# Altium PCB CT310高端控制盒核心板电路V1.2.PcbDoc (part 2 of 4)
Units mil, origin at the board's own origin, x right, y up, seen from the top; angles counter-clockwise.
Board outline 3735.76 x 4625 mil, 2 copper layers (TOP, BOTTOM), stack 10.4 mil thick; 194 components, 362 nets, 1084 pads, 348 vias.
Unrouted connection lines stored in the file: 16.
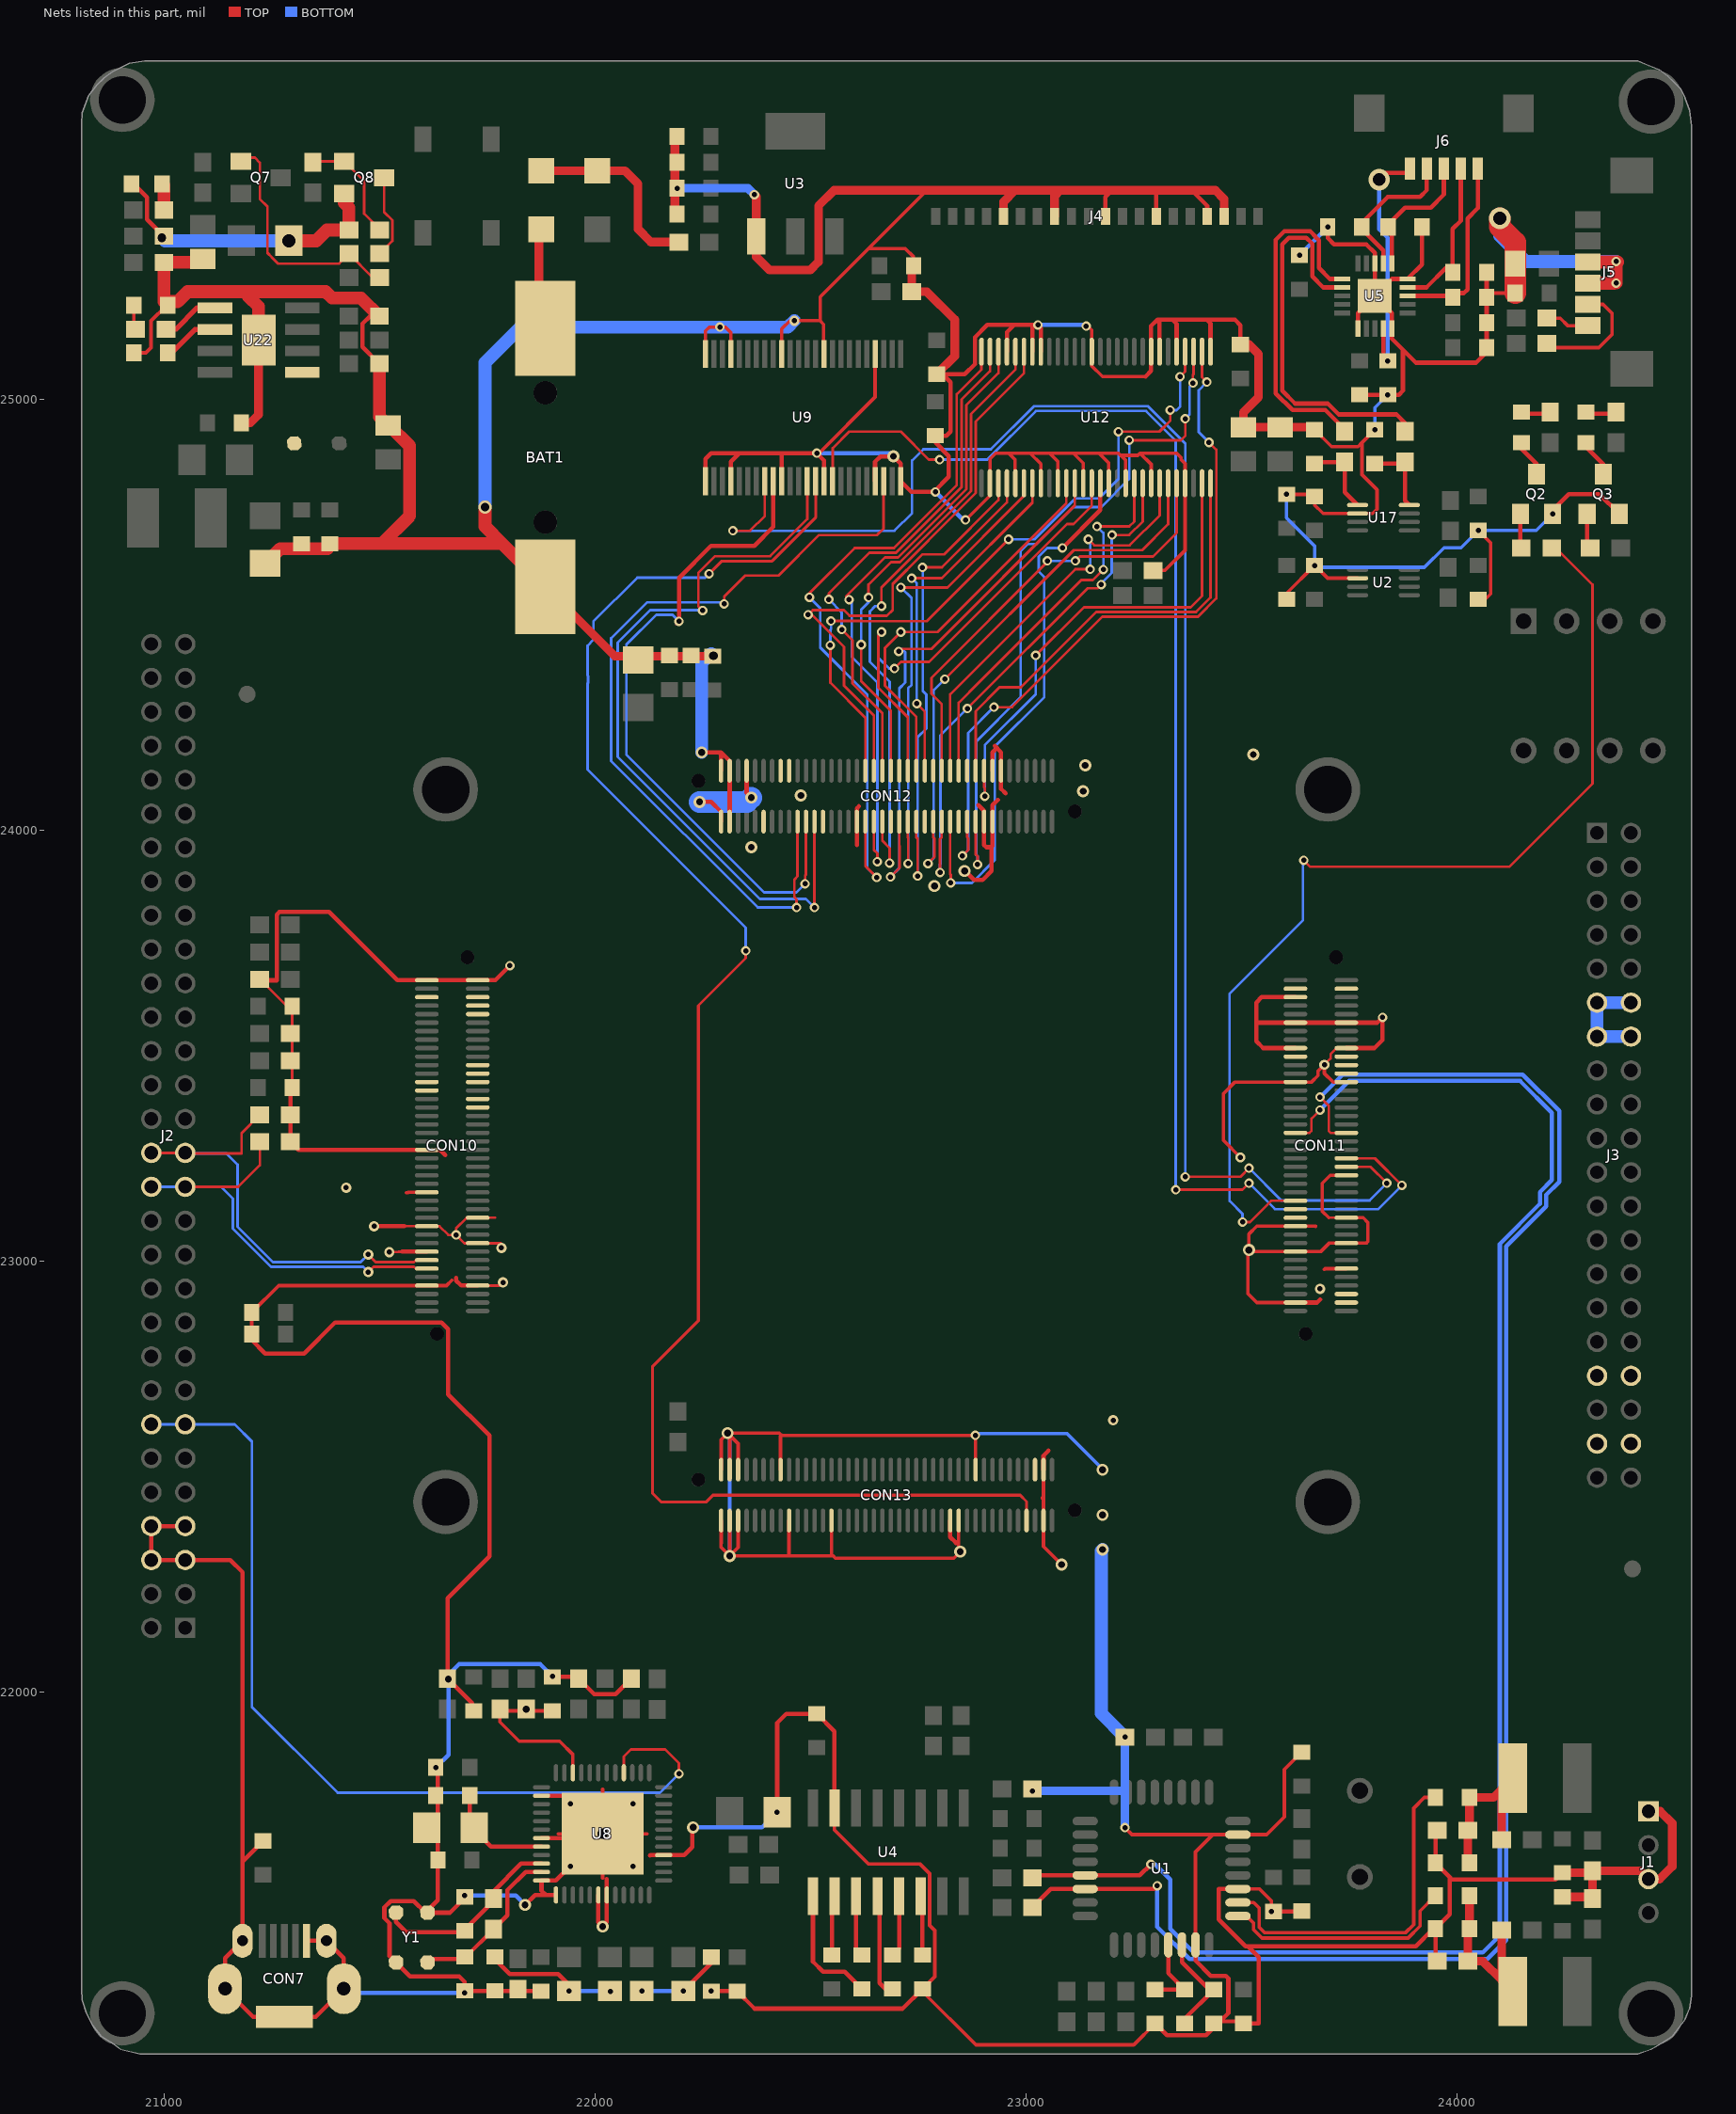
[diagram p2: the nets of this part, all layers, seen from the top]

## Via types
v1: diameter 22, hole 12, TOP to BOTTOM, tented both sides, 194 vias
v2: diameter 22, hole 12, TOP to BOTTOM, 92 vias
v3: diameter 28, hole 16, TOP to BOTTOM, 37 vias
v4: diameter 24, hole 12, TOP to BOTTOM, 17 vias
v5: diameter 50, hole 30, TOP to BOTTOM, tented both sides, 4 vias
v6: diameter 30, hole 20, TOP to BOTTOM, tented both sides, 3 vias
v7: diameter 40, hole 24, TOP to BOTTOM, 1 vias

## Nets (pads, with @x,y where several pads share a name; then routed paths per layer and width w, separated by ;. In a path a pad name is that pad's centre, name@x,y a point inside that pad or via, vN(x,y) a via of type N, cw(c..) or ccw(c..) an arc to the next point about the centre after c; other vN are vias at no path point) (continued)
GM_INT2: CON10.53
GND: BAT1.2 C1.2 C2.2 C3.2 C6.1 C7.1 C8.1 C11.2 C13.2 C16.1 C17.2 C18.2 C20.2 C21.2 C22.2 C23.1 C24.2 C25.2 C26.2 C27.2 C28.1 C29.1 C30.2 C31.2 C32.2 C33.2 C34.2 C35.1 C36.2 C37.2 C38.2 C39.2 C40.2 C41.1 C42.1 C43.1 C44.1 C45.1 C46.1 C47.1 C48.1 C49.1 C50.1 C51.1 C52.1 C53.1 C54.1 C55.1 C56.2 C57.2 C58.2 C59.2 C60.2 C61.2 C62.2 C79.2 C80.2 C87.2 C88.2 C89.1 C93.2 C95.2 C96.2 C112.2 C117.2 C118.2 C128.2 C129.2 C130.2 C148.2 C149.2 C150.2 C154.2 CON7.5 CON7.6 CON7.7 CON7.8 CON7.9 CON7.10 CON10.7 CON10.8 CON10.15 CON10.18 CON10.21 CON10.24 CON10.29 CON10.39 CON10.79 CON10.80 CON11.6 CON11.11 CON11.12 CON11.17 CON11.18 CON11.25 CON11.26 CON11.47 CON11.57 CON11.60 CON11.63 CON11.66 CON11.69 CON11.78 CON12.14 CON12.15 CON12.16 CON12.17 CON12.47 CON12.74 CON12.77 CON12.78 CON12.79 CON12.80 CON13.3 CON13.4 CON13.20 CON13.23 CON13.25 CON13.53 CON13.63 CON13.66 CON13.75 CON13.76 CON13.77 CON13.78 CON13.79 CON13.80 D3.2 J1.1 J1.3 J2.5 J2.6 J2.7 J2.8 J3.11 J3.12 J3.13 J3.14 J3.33 J3.34 J3.37 J3.38 J4.3 J4.4 J4.7 J4.10 J4.13 J4.16 J5.3 J5.4 Q2.2 Q3.2 Q8.2 R4.1 R5.1 R11.2 R12.2 R14.1 R15.1 R26.1 R29.1 R32.2 R33.2 R42.1 R43.2 R44.1 R45.2 R89.2 R119.1 R120.1 R128.1 R129.1 R133.2 R135.2 R174.1 U1.3 U1.7 U1.31 U2.2 U3.1 U4.15 U5.6 U5.10 U5.15 U5.18 U5.21 U8.1 U8.6 U8.7 U8.16 U8.38 U8.43 U8.48 U8.49 U9.4 U9.10 U9.15 U9.21 U9.24 U9.25 U9.28 U9.34 U9.39 U9.45 U9.48 U12.2 U12.5 U12.8 U12.10 U12.13 U12.16 U12.18 U12.21 U12.25 U12.29 U12.33 U12.35 U12.36 U12.43 U12.49 U12.50 U12.53 U17.2 U22.9 Y1.2 Y1.4 | length 41790.9
  TOP w6: R174.1@21224.93,23651.63 21285.35,23591.21 C87.2@21297.22,23591.21 C88.2@21297.22,23402.43 ; v4(21522.85,23020.81) 21542.85,23020.81 21543.88,23021.83 21552.85,23021.83 ; 21557.85,23080.57 21558.17,23080.88 CON10.21@21609.9,23080.88 21639.12,23080.88 21659.43,23060.57 v2(21677.85,23060.57) ; CON10.8@21728.01,22943.1 21785.38,22943.1 21786.85,22944.57 v4(21786.85,22950.57) ; 21764.52,23100.57 21767.85,23100.57 ; 21764.51,23100.58 CON10.24@21728.01,23100.58 21702.58,23100.58 21677.85,23075.85 v2(21677.85,23060.57) ; v4(21782.85,23030.57) 21782.85,23040.57 21781.91,23041.51 CON10.18@21728.01,23041.51 21696.91,23041.51 v2(21677.85,23060.57) ; v4(23692.85,23455.57) 23707.26,23469.98 23707.26,23480.38 23721.16,23494.28 CON11.17@23743.76,23494.28 ; 23702.86,23100.58 CON11.57@23743.76,23100.58
  TOP w8: C96.2@20930.06,25107.85 20957.85,25107.85 20970,25120 20970,25182.06 21005.8,25217.85 C95.2@21008.8,25217.85 C95.2@21017.74,25226.79 ; C112.2@21203.48,22830.57 C117.2@21203.48,22880.57 21266.01,22943.1 CON10.7@21609.9,22943.1 21655.38,22943.1 21667.85,22955.57 ; 21562.85,23158.94 21566.23,23158.94 21566.9,23159.62 CON10.29@21609.9,23159.62 ; 21914.85,21670.57 v7(22017.85,21670.57) ; 22017.85,21567.57 v7(22017.85,21670.57) ; 22017.85,21773.57 v7(22017.85,21670.57) ; 22120.86,21670.57 v7(22017.85,21670.57) ; U9.24@22256.47,25105.28 22256.47,25158.54 22265.57,25167.64 v1(22290,25167.64) 22302.85,25167.64 22315.53,25154.96 U9.21@22315.53,25105.28 ; CON13.79@22292.97,22397.81 22292.97,22345.69 22292.85,22345.57 22292.85,22335.57 v3@22312.66,22315.76 ; CON13.80@22292.97,22515.93 22292.97,22585.69 v3(22307.85,22600.57) ; CON13.77@22312.66,22397.81 v3@22312.66,22315.76 ; CON13.78@22312.66,22515.93 v3@22312.66,22595.76 ; v3(22312.85,22315.57) 22450.45,22315.57 ; CON13.75@22332.34,22397.81 22332.34,22335.44 v3@22312.66,22315.76 ; CON13.76@22332.34,22515.93 22332.34,22576.08 v3@22312.66,22595.76 ; C34.2@22402.85,21692.57 C34.2@22402.85,21748.57 ; CON13.66@22430.77,22515.93 22430.77,22593.49 22432.85,22595.57 ; U9.15@22433.65,25105.28 22433.65,25163.43 v4@22452.85,25182.64 ; CON13.63@22450.45,22397.81 22450.45,22315.57 ; v4(22462.85,25182.64) 22522.36,25182.64 ; v1(22515,24875) 22520,24875 22650.17,25005.17 U9.4@22650.17,25105.28 ; U9.10@22532.06,25105.28 22530.76,25106.59 22530.76,25174.24 22522.36,25182.64 ; 22548.88,22319.54 CON13.53@22548.88,22397.81 ; U4.15@22555.96,21730.67 22555.96,21679.04 22634,21601 22754.02,21601 22776.77,21578.26 22776.77,21458.23 22788.69,21446.31 22788.69,21339.31 C13.2@22760,21310.63 22760,21305 22884,21181 23250.37,21181 C16.1@23300,21230.63 ; C150.2@22739.37,25310 22739.37,25330.63 22720,25350 22635,25350 ; 22770,25485 22635,25350 ; 22837.85,22345.57 22844.15,22351.87 ; CON13.23@22844.15,22397.81 22844.15,22351.87 ; v1(22860,24720) 22916.79,24776.79 U12.2@22916.79,24805.4 22916.79,24861.79 22930,24875 22960,24875 ; CON13.20@22883.52,22515.93 22883.52,22594.91 v1(22882.85,22595.57) 22432.85,22595.57 ; U12.5@22975.85,24805.4 22975,24806.24 22975,24860 22960,24875 ; U12.8@23034.9,24805.4 23034.9,24850.1 23010,24875 ; 23037.85,22450.57 23041,22447.43 ; CON13.4@23041,22515.93 23041,22447.43 ; U12.10@23074.27,24805.4 23074.27,24855.73 23055,24875 ; v3(23082.85,22295.57) 23057.85,22320.57 23057.85,22320.77 23041,22337.63 CON13.3@23041,22397.81 23041,22447.43 ; U12.13@23133.33,24805.4 23133.33,24851.67 23110,24875 ; v1@23141.99,25171.99 23153.01,25160.97 U12.43@23153.01,25110.52 23153.01,25077.49 23177.85,25052.64 23277.85,25052.64 ; U12.16@23192.38,24805.4 23192.38,24852.62 23170,24875 ; v1(23230,21685) 23246.26,21668.74 23433.74,21668.74 ; U12.18@23231.75,24805.4 23231.75,24858.25 23215,24875 ; U12.21@23290.81,24805.4 23290.81,24849.19 23265,24875 ; R89.2@23295.43,24602.85 23322.85,24602.85 23369.55,24649.55 U12.25@23369.55,24805.4 23369.55,24850.96 23360,24860.5 23360,24865 23350,24875 23265,24875 ; U1.31@23393.74,21412.83 23393.74,21628.74 23433.74,21668.74 ; C8.1@23450.63,21235.63 C7.1@23505,21235.63 ; U1.3@23492.17,21542.76 23542.24,21542.76 23570,21515 v1(23570,21490.63) ; v2(23497.85,23240.57) 23458.89,23279.53 23458.89,23388.89 23485.54,23415.54 CON11.26@23625.65,23415.54 23663.12,23415.54 23678,23430.42 23678,23440.72 v4(23692.85,23455.57) 23692.85,23435.61 23712.92,23415.54 CON11.25@23743.76,23415.54 ; C40.2@23605,24535.63 23605,24549.37 v1(23670,24614.37) 23670.63,24614.37 23700.16,24584.84 U2.2@23769.96,24584.84 ; C57.2@23605,24779.37 23665,24779.37 C80.2@23670,24774.37 23670,24755 23690.16,24734.84 U17.2@23769.96,24734.84 23804.84,24734.84 23815,24745 23815,24790 23780,24825 23780,24899.37 ; CON11.78@23625.65,22903.72 23536.28,22903.72 23515,22925 23515,23022.79 v3(23517.85,23025.65) ; C23.1@23640,21860 23600,21820 23600,21710 23558.74,21668.74 U1.7@23492.17,21668.74 23433.74,21668.74 ; C149.2@23670,24929.37 23709.37,24890 23770.63,24890 23780,24899.37 ; 23672.85,23080.57 23672.54,23080.88 CON11.60@23625.65,23080.88 23535.88,23080.88 23517.85,23062.85 v3(23517.85,23025.65) ; 23692.85,22980.57 23694.75,22982.47 CON11.69@23743.76,22982.47 ; 23702.86,23100.58 23687.85,23115.58 23687.85,23180.58 23706.26,23198.99 CON11.47@23743.76,23198.99 ; CON11.57@23743.76,23100.58 23782.85,23100.58 23793.42,23090 23793.42,23044.94 23790,23041.51 CON11.63@23743.76,23041.51 23703.79,23041.51 23684.12,23021.83 CON11.66@23625.65,23021.83 23521.67,23021.83 v3(23517.85,23025.65) ; v1(23810,24929.37) 23780,24899.37 ; C25.2@24050,24535.63 24065.63,24535.63 24078.69,24548.69 24078.69,24666.94 v1(24050,24695.63) ; C55.1@24069.37,25246.67 C49.1@24135.63,25246.67 ; v3(22307.85,22600.57) v3@22312.66,22595.76 ; v3(22307.85,22600.57) 22427.85,22600.57 22432.85,22595.57 ; 22450.45,22315.57 22552.85,22315.57 22557.85,22310.57 22832.85,22310.57 v3(22847.85,22325.57) 22844.15,22329.28 22844.15,22351.87 ; 22522.36,25182.64 22522.64,25182.64 22522.64,25237.64 22635,25350 ; 22960,24875 23010,24875 ; 23010,24875 23055,24875 ; 23055,24875 23110,24875 ; 23110,24875 23170,24875 ; 23170,24875 23215,24875 ; 23215,24875 23220,24870 23260,24870 23265,24875
  TOP w10: D3.2@20932.93,25500 20932.93,25496.69 20960.65,25468.97 20960.65,25417.78 R5.1@20999.22,25379.22 ; J2.7@21049.37,22384.86 J2.8@20970.63,22384.86 J2.6@20970.63,22306.12 J2.5@21049.37,22306.12 21153.88,22306.12 21181.99,22278.01 21181.99,21606.36 ; C112.2@21203.48,22830.57 21203.48,22816.52 21235,22785 21325,22785 21396.88,22856.88 21644.3,22856.88 21659.53,22841.65 21659.53,22690.47 21755,22595 21755,22315 21657.85,22217.85 R44.1@21657.85,22031 21715,21973.86 C33.2@21715,21956.2 ; R174.1@21222.42,23654.14 21224.93,23651.63 21261.63,23651.63 21261.63,23803.83 21267.81,23810 21383.42,23810 21541.67,23651.75 CON10.79@21609.9,23651.75 CON10.80@21728.01,23651.75 21769.03,23651.75 v2(21802.85,23685.57) ; C89.1@21230,21654.37 21181.99,21606.36 ; C88.2@21293.29,23398.49 R129.1@21293.29,23339.5 R128.1@21293.29,23276.57 21311.8,23258.06 CON10.39@21609.9,23258.06 21640.37,23258.06 21652.85,23245.57 ; CON7.5@21330.61,21422.42 CON7.7@21376.87,21422.42 21417.22,21382.07 CON7.9@21417.22,21311.2 ; CON7.9@21417.22,21277.78 CON7.9@21417.22,21311.2 ; v4(21487.85,23080.57) 21488.17,23080.88 21558.17,23080.88 ; R135.2@21499.28,25192.85 21477.85,25192.85 21460.65,25175.65 21460.65,25121.59 21499.38,25082.85 R133.2@21499.86,25082.85 ; 21552.85,23021.83 CON10.15@21609.9,23021.83 ; C27.2@21609.88,21685 21635.63,21659.25 C31.2@21635.63,21610 21635.63,21516.5 21611.54,21492.41 Y1.2@21611.54,21487.68 ; v1(21630.63,21825) 21635.63,21820 C27.2@21635.63,21685 ; 21677.85,22960.57 21677.85,22954.76 21689.51,22943.1 CON10.8@21728.01,22943.1 ; v1(21697.85,21301.2) C36.2@21697.85,21306.2 ; C37.2@21697.85,21521.44 21664.09,21487.68 Y1.2@21611.54,21487.68 ; C37.2@21697.85,21524.37 v1(21697.85,21527.15) ; R33.2@21821.43,21306.2 21874.43,21306.2 C38.2@21875,21305.63 ; R33.2@21821.43,21310.14 21817.49,21306.2 C29.1@21767.85,21306.2 C36.2@21697.85,21306.2 ; v3(21837.85,21505.57) 21861.12,21528.84 21886.12,21528.84 ; U8.43@21876.12,21660.73 22008.01,21660.73 v2(21942.85,21595.57) 21909.59,21562.3 U8.48@21876.12,21562.3 21876.12,21538.84 21886.12,21528.84 ; U8.38@21876.12,21759.15 21929.27,21759.15 v7(22017.85,21670.57) ; v1(21901.43,22036.43) C35.1@21901.43,22034.94 21958.38,22034.94 R45.2@21962.32,22031 21998.32,21995 22048.1,21995 R42.1@22084.11,22031 ; U8.1@21909.59,21528.84 21886.12,21528.84 ; U8.6@22008.01,21528.84 22008.01,21465.41 v3(22017.85,21455.57) 22027.7,21465.41 U8.7@22027.7,21528.84 22027.7,21565.41 ; 22127.85,21620.57 22128.64,21621.36 U8.16@22159.59,21621.36 22207.72,21621.36 22226.36,21640 22226.36,21685.57 v3(22227.85,21685.57) ; C41.1@22190.63,25430 v1(22190.63,25490) C42.1@22190.63,25550 C43.1@22190.63,25610 ; v3(22242.85,24065.57) 22269.76,24065.57 22292.97,24042.36 CON12.79@22292.97,24019.86 ; v3(22247.85,24180.57) 22287.85,24180.57 ; U9.25@22256.47,24810 22256.47,24861.47 22270,24875 22335,24875 ; v1(22270,21305.63) C39.2@22330,21305.63 22370.63,21265 22714.37,21265 C13.2@22760,21310.63 ; CON12.80@22292.97,24137.98 22292.97,24175.45 22287.85,24180.57 ; CON12.77@22312.66,24019.86 CON12.78@22312.66,24137.98 22312.66,24160.48 22292.57,24180.57 22287.85,24180.57 ; U9.28@22315.53,24810 22315.53,24855.53 22335,24875 ; CON12.74@22352.03,24137.98 22352.03,24086.39 v3(22362.85,24075.57) ; v1(22422.97,21720.57) 22422.97,21927.97 22444.37,21949.37 C11.2@22515,21949.37 22555.96,21908.41 U4.15@22555.96,21730.67 ; U9.34@22433.65,24810 22433.65,24871.35 22430,24875 ; U9.39@22532.06,24810 22532.06,24857.94 v1(22515,24875) 22430,24875 ; 22607.85,23965.57 22607.93,23965.65 CON12.47@22607.93,24019.86 22607.93,24050.65 22612.85,24055.57 ; U9.45@22650.17,24810 22650.17,24855.17 22662.64,24867.64 v3(22692.85,24867.64) 22709.24,24851.26 U9.48@22709.24,24810 22734.24,24785 v1(22790,24785) ; v1@22788,24787 22821,24820 22821,24868.7 22790,24899.7 C58.2@22790,24915.63 22815.63,24915.63 22825,24925 22825,25040 C30.2@22806.73,25058.27 ; C30.2@22792.85,25058.27 C30.2@22806.73,25058.27 ; CON13.25@22824.47,22397.81 22824.47,22359.31 22837.85,22345.93 22837.85,22345.57 ; v3(22857.85,23905.57) 22859.43,23905.57 22880,23885 22900,23885 22920,23905 22920,23960.57 ; 22890.15,24058.36 22903.21,24045.29 CON12.17@22903.21,24019.86 22903.21,23965.21 22907.85,23960.57 22920,23960.57 ; CON12.16@22922.89,24137.98 22922.89,24180.61 22927.85,24185.57 ; 22927.85,24195.57 22942.58,24180.85 CON12.14@22942.58,24137.98 22942.58,24095.85 22952.85,24085.57 ; 22935.1,24070.57 22922.89,24058.36 CON12.15@22922.89,24019.86 22922.89,23963.46 22920,23960.57 ; U12.53@22956.16,25110.52 22956.16,25155.95 22972.85,25172.64 ; 23015,25167.64 23015.22,25167.43 U12.50@23015.22,25110.52 ; U12.49@23034.9,25110.52 23034.9,25165.6 v1(23027.85,25172.64) 22972.85,25172.64 ; CON13.4@23041,22515.93 23041,22548.72 23052.85,22560.57 ; J4.10@23184.69,25425 23184.69,25469.69 23200,25485 ; 23277.85,25052.64 23290.81,25065.6 U12.36@23290.81,25110.52 23290.81,25170.19 23305.31,25184.69 ; 23295,25485 23302.8,25477.2 J4.7@23302.8,25425 ; C16.1@23300,21230.63 23327.72,21202.91 23417.91,21202.91 23450.63,21235.63 23470,21255 23470,21335 23464,21341 23429,21341 23393.74,21376.26 U1.31@23393.74,21412.83 ; U12.35@23310.49,25110.52 23310.49,25179.51 23305.31,25184.69 ; U12.33@23349.86,25110.52 23349.86,25175.14 23340.31,25184.69 ; 23392.5,25477.5 23420.91,25449.09 J4.4@23420.91,25425 ; U12.29@23428.6,25110.52 23428.6,25176.4 23420.31,25184.69 ; U1.3@23492.17,21542.76 23447.76,21542.76 23447.76,21472.24 23510,21410 23515,21410 ; C60.2@23497.85,25127.01 23497.85,25172.15 23485.31,25184.69 23420.31,25184.69 ; C7.1@23505,21230.63 23540.63,21230.63 23540.63,21384.37 23515,21410 ; C6.1@23575,21490.63 23639.37,21490.63 C22.2@23640,21491.26 ; CON11.78@23625.65,22903.72 23676.01,22903.72 23682.85,22910.57 ; CON11.18@23625.65,23494.28 23550.72,23494.28 23535,23510 23535,23555 ; CON11.6@23625.65,23612.38 23547.38,23612.38 23535,23600 23535,23555 ; v1(23700.63,25400) 23700.63,25374.37 23715,25360 23790,25360 23810,25340 U5.18@23810,25315.79 U5.21@23810,25240 ; CON11.17@23743.76,23494.28 23809.28,23494.28 23827.85,23512.85 v2(23827.85,23565.57) 23815.61,23553.32 CON11.11@23743.76,23553.32 CON11.12@23625.65,23553.32 23536.68,23553.32 23535,23555 ; U5.6@23770.63,25164.21 23770.63,25200.63 U5.21@23810,25240 ; C46.1@23775,25010.63 v1(23840,25010.63) 23865.63,25010.63 23875,25020 23875,25115 ; C53.1@23919.37,25400 23919.37,25312.95 U5.15@23885.79,25279.37 23849.37,25279.37 U5.21@23810,25240 ; R15.1@23954.57,21375 23950.63,21378.94 C18.2@23950.63,21451 ; R29.1@23954.57,21679 23950.63,21675.06 C21.2@23950.63,21603 23983.63,21570 ; C54.1@24069.37,25305 24069.37,25246.67 24069.37,25109.37 24045,25085 23905,25085 23875,25115 ; v1(24222.5,24733.75) 24222.5,24742.5 24260,24780 24331.25,24780 Q3.2@24377.5,24733.75 ; C20.2@24245,21580.63 24229.37,21565 23988.63,21565 23983.63,21570 ; 21181.99,21606.36 CON7.6@21181.99,21422.42 21141.63,21382.07 CON7.8@21141.63,21311.2 21206.79,21246.04 CON7.10@21279.43,21246.04 21352.07,21246.04 CON7.9@21417.22,21311.2 ; Y1.2@21611.54,21487.68 21606.81,21487.68 21579.74,21514.74 21526.01,21514.74 21511.4,21500.14 21511.4,21475.23 21523.46,21463.16 21523.46,21387.32 Y1.4@21538.46,21372.32 21570.78,21340 21685,21340 21697.85,21327.15 C36.2@21697.85,21306.2 ; 22335,24875 22430,24875 ; C30.2@22806.73,25058.27 22858.27,25058.27 22881.79,25081.79 22881.79,25144.03 22910.41,25172.64 22972.85,25172.64 ; 23305.31,25184.69 23340.31,25184.69 ; 23340.31,25184.69 23420.31,25184.69 ; 23515,21410 23905,21410 23946,21451 C18.2@23950.63,21451 ; U5.21@23810,25240 23849.37,25200.63 U5.10@23849.37,25164.21 23849.37,25140.63 23875,25115 ; C18.2@23950.63,21451 23983.63,21484 23983.63,21570
  TOP w20: C154.2@21179.37,24945 21200,24945 21219.43,24964.43 U22.9@21219.43,25137.35 ; BAT1.2@21885,24565 22046.06,24403.94 C118.2@22108.82,24403.94 ; C118.2@22100,24395.12 C118.2@22108.82,24403.94 ; C41.1@22185,25435.63 C43.1@22185,25610 ; C128.2@22273.85,24403.94 C118.2@22108.82,24403.94 ; v1(22370,25475) 22374.45,25470.55 U3.1@22374.45,25377.95 22374.45,25330.55 22405,25300 22500,25300 22518.9,25318.9 22518.9,25448.9 22555,25485 22770,25485 22975,25485 ; C150.2@22739.37,25310 22735.43,25306.06 R26.1@22735.43,25250 22770,25250 22835,25185 22835,25100.42 C30.2@22792.85,25058.27 ; J4.16@22948.46,25425 22948.46,25458.46 22975,25485 ; J4.13@23066.57,25425 23066.57,25471.57 23080,25485 ; J4.3@23460.28,25425 23460.28,25464.72 23440,25485 23295,25485 23200,25485 23080,25485 ; C60.2@23497.85,25127.01 23517.99,25127.01 23540,25105 23540,25005 23505,24970 C59.2@23505,24935.28 C56.2@23590,24935.28 23664.09,24935.28 C149.2@23670,24929.37 ; C17.2@24245,21524.37 24311.06,21524.37 R14.1@24315,21520.43 R32.2@24315,21584.57 ; C20.2@24245,21580.63 24311.06,21580.63 R32.2@24315,21584.57 ; J1.1@24445,21723.11 24471.89,21723.11 24500,21695 24500,21595 24470.63,21565.63 J1.3@24445,21565.63 24426.06,21584.57 R32.2@24315,21584.57 ; 22975,25485 23080,25485
  TOP w30: C62.2@21104.43,25328.48 21093.8,25317.85 R4.1@20999.86,25317.85 20999.86,25226.79 21017.74,25226.79 21031.79,25226.79 21055,25250 21375,25250 21390,25235 21457.13,25235 21499.28,25192.85 R135.2@21499.86,25192.85 ; 21195.83,25239.17 21219.43,25215.57 U22.9@21219.43,25137.35 ; C1.2@21234.43,24617.74 21270.18,24653.48 C2.2@21379.43,24653.48 ; v5(21289.55,25367.85) 21352.85,25367.85 21377.85,25392.85 R11.2@21429.25,25392.85 21429.25,25445.04 21418.43,25455.85 ; C2.2@21384.43,24665 21505.5,24665 ; R133.2@21499.86,25082.85 21499.86,24959.51 C93.2@21520,24939.37 21522.69,24939.37 21570,24892.06 21570,24729.5 21505.5,24665 ; v6(21745,24750) 21745,24705 21785,24665 ; BAT1.2@21885,24565 21785,24665 ; J5.3@24303.82,25269.47 24364.47,25269.47 24365,25270 v1(24370,25270) v1@24370,25315 ; J5.4@24303.82,25318.67 v1@24373.67,25318.67 ; 21505.5,24665 21785,24665
  TOP w50: v5(24100,25420) 24100,25400 24135.63,25364.37 C50.1@24135.63,25314.84 C49.1@24135.63,25246.67
  BOTTOM w8: v3(22307.85,22600.57) 22312.85,22595.57 v3(22312.85,22315.57) ; v1(22882.85,22595.57) 22887.28,22600 23095,22600 23177.85,22517.15 v3(23177.85,22515.57) ; 23229.57,21770.43 23230,21770.87 ; v1(23605,24780) 23605,24725 23670,24660 v1(23670,24614.37) 23674.37,24610 23925,24610 23970.63,24655.63 24010,24655.63 v1(24050,24695.63) 24184.38,24695.63 v1(24222.5,24733.75) ; v1(23810,24929.37) 23810,24980.63 v1(23840,25010.63)
  BOTTOM w10: CON7.9@21417.22,21311.2 21427.22,21301.2 v1(21697.85,21301.2) ; v1(21630.63,21825) 21660,21854.37 v3(21660,22030) 21660,22040 21685,22065 21872.85,22065 v1(21901.43,22036.43) ; v1(21697.85,21527.15) 21816.28,21527.15 v3(21837.85,21505.57) ; v3(22227.85,21685.57) 22387.97,21685.57 v1(22422.97,21720.57) ; v1(22515,24875) 22685.5,24875 v3(22692.85,24867.64) ; v1(22790,24785) 22855,24720 v1(22860,24720) ; v1(23027.85,25172.64) 23137.36,25172.64 v1(23140,25170) ; v1(23635,25335) 23635.63,25335 v1(23700.63,25400)
  BOTTOM w20: v1(22190.63,25490) 22355,25490 v1(22370,25475) ; v1(23015.43,21770.43) 23229.57,21770.43 ; v1(23230,21685) 23230,21770.87 v1(23230,21895)
  BOTTOM w30: v6(20995,25375) 21002.15,25367.85 v5(21289.55,25367.85) ; v6(21745,24750) 21745,25085 21827.64,25167.64 v1(22290,25167.64) 22447.85,25167.64 v4(22462.85,25182.64) ; v3(22247.85,24180.57) 22247.85,24387.85 22270,24410 v6(22275,24405) ; v3(23177.85,22330.57) 23175,22327.72 23175,21950 v1(23230,21895) ; v5(24100,25420) 24100,25380 24160,25320 v1(24370,25320) ; J3.14@24404.37,23521.01 J3.13@24325.63,23521.01 J3.11@24325.63,23599.75 J3.12@24404.37,23599.75
  BOTTOM w50: v3(22242.85,24065.57) 22352.85,24065.57 v3(22362.85,24075.57)
  other v2: 22087.85,21595.57 21942.85,21740.57 22087.85,21740.57
  other v3: 23177.85,22410.57 22787.85,23870.57 22362.85,23960.57 22477.85,24080.57 23132.85,24090.57 23137.85,24150.57 23527.85,24175.57
  other v4: 23202.85,22630.57 23682.85,22935.57 21422.85,23170.57
GPC1_1: CON13.7 U9.38 | length 3904.9
  TOP w6: 22240,23592.72 22350,23702.72 v2(22350,23720)
  TOP w7: 22240,23592.72 22240,22861.26 22133.5,22754.76 22133.5,22461.5 22154.43,22440.57 22257.85,22440.57 22273.85,22456.57 22986.85,22456.57 23001.63,22441.8 CON13.7@23001.63,22397.81 ; v1(22265,24595) 22294.5,24624.5 22411.32,24624.5 22512.38,24725.57 U9.38@22512.38,24810
  BOTTOM w6: v1(22265,24595) 22256.07,24586.07 22098.35,24586.07 21996.5,24484.22 21996.5,24441.85 21982.85,24428.2 21982.85,24359.02 21984,24357.87 21984,24342.13 21982.85,24340.98 21982.85,24140.57 22350,23773.42 v2(22350,23720)
GPS33_EN: CON12.55
GPS_32K: CON10.60
GPS_RST: CON12.61 U9.46 | length 1915.8
  TOP w6: v1(22300,24525) 22300,24541.87 22349.13,24591 22426,24591 22520,24685 22655,24685 22669.87,24699.87 U9.46@22669.87,24810 ; v2(22467.85,23820.57) 22467.85,23839.57 22462.85,23844.57 22462.85,23885.57 22470.14,23892.86 CON12.61@22470.14,24019.86
  BOTTOM w6: v1@22296.57,24529 22121.28,24529 22037.85,24445.57 22037.85,24160.57 22377.85,23820.57 v2(22467.85,23820.57)
GPS_RXD: CON12.57 U9.37 | length 1771.1
  TOP w6: v1(22250,24510) 22240,24520 22240,24596.87 22279.13,24636 22406.56,24636 22492.69,24722.14 U9.37@22492.69,24810 ; v2(22509.51,23820.57) CON12.57@22509.51,24019.86
  BOTTOM w6: v1@22243.33,24511 22128.28,24511 22052.85,24435.57 22052.85,24170.57 22382.85,23840.57 22489.51,23840.57 v2(22509.51,23820.57)
GPS_SYNC: CON12.64
GPS_TXD: CON12.59 U9.33 | length 1594.9
  TOP w6: v2(22487.85,23875.57) 22487.85,23894.57 22489.82,23896.53 CON12.59@22489.82,24019.86
  TOP w10: v1@22190,24480 v1(22195,24485) 22195,24585.81 22269.19,24660 22370,24660 22413.95,24703.95 U9.33@22413.95,24810
  BOTTOM w6: v1(22195,24485) 22180,24500 22142.28,24500 22072.85,24430.57 22072.85,24175.57 22392.85,23855.57 22467.85,23855.57 v2(22487.85,23875.57)
GPX0_0: CON13.6
GYRO_INT: CON10.55
HDMI_HPD: CON11.21
HDMI_IIC_EN: CON11.23
HOOK_DET: CON10.50
HUB_CONNECT: CON11.77
HUB_INT_N: CON11.75
HUB_RESET: CON11.58
I2C_SCL0: CON11.20
I2C_SCL1: CON10.75
I2C_SCL5: CON10.74
I2C_SCL6: CON11.43 U9.40 | length 3463.5
  TOP w6: U9.40@22551.76,24810 22551.76,24886.76 22590,24925 22710,24925 22775,24860 v1(22800,24860) ; v2(23347.85,23165.57) 23502.85,23165.57 v2(23517.85,23180.57) ; CON11.43@23743.76,23238.36 23810.06,23238.36 v2(23872.85,23175.57)
  BOTTOM w6: v1(22800,24860) 22910.56,24860 23023.56,24973 23279.02,24973 23347.85,24904.16 v2(23347.85,23165.57) ; v2(23517.85,23180.57) 23577.85,23120.57 23817.85,23120.57 v2(23872.85,23175.57)
I2C_SCL7: CON11.38 R28.1 U1.21 | length 3917.9
  TOP w6: CON11.38@23625.65,23297.42 23657.85,23297.42 23662.85,23302.42 23662.85,23330.57 v2(23682.85,23350.57)
  TOP w10: R28.1@23015.43,21568.75 23020.94,21574.25 U1.21@23137.83,21574.25 23264.25,21574.25 v1(23290,21600)
  BOTTOM w10: v1(23290,21600) 23300,21600 23335,21565 23335,21450 23390,21395 24060,21395 24100,21435 24100,23040 24192.88,23132.88 24192.88,23160 24221,23188.12 24221,23344 24147,23418 23750.28,23418 v2(23682.85,23350.57)
I2C_SDA0: CON11.19
I2C_SDA1: CON10.76
I2C_SDA5: CON10.72
I2C_SDA6: CON11.45 U9.32 | length 3781.8
  TOP w6: v1(22320,24695) 22360,24695 22394.28,24729.28 U9.32@22394.28,24810 ; v2(23369.85,23195.57) 23497.85,23195.57 v2(23517.85,23215.57) ; CON11.45@23743.76,23218.69 23799.74,23218.69 v2(23837.85,23180.57)
  BOTTOM w6: v1(22320,24695) 22695,24695 22736,24736 22736,24857.87 22762.13,24884 22919,24884 23019,24984 23283.57,24984 23369.85,24897.72 v2(23369.85,23195.57) ; v2(23517.85,23215.57) 23592.85,23140.57 23797.85,23140.57 v2(23837.85,23180.57)
I2C_SDA7: CON11.37 R27.1 U1.22 | length 3981.6
  TOP w6: v2(23682.85,23380.57) 23702.85,23360.57 23702.85,23301.83 23707.26,23297.42 CON11.37@23743.76,23297.42
  TOP w10: R27.1@23015.43,21500 23058.19,21542.76 U1.22@23137.83,21542.76 23297.76,21542.76 v1(23305,21550)
  BOTTOM w10: v1(23305,21550) 23305,21455 23380,21380 24071.21,21380 24115,21423.79 24115,23033.79 24207.88,23126.66 24207.88,23153.79 24238,23183.91 24238,23348.21 24153.21,23433 23735.28,23433 v2(23682.85,23380.57)
ISP_SCL: CON11.3
ISP_SDA: CON11.4
KP_COL0: CON11.54 R1.2 | length 2414.3
  TOP w6: v2(23502.85,23090.57) 23520.08,23090.57 23569.46,23139.94 CON11.54@23625.65,23139.94 ; v2(23645,23930) 23660,23915 24121.87,23915 24315,24108.13 24315,24570 24230,24655 R1.2@24220.43,24655
  BOTTOM w6: v2(23502.85,23090.57) 23502.85,23109.57 23472.85,23139.57 23472.85,23620.57 23642.85,23790.57 23642.85,23927.85 v2(23645,23930)
KP_ROW0: CON10.56
KP_ROW1: CON10.58
LCD_DEN: CON12.21 U12.30 | length 1683.9
  TOP w6: v2(22852.85,23940.57) 22866.29,23954.01 22866.29,23980.91 22863.84,23983.36 CON12.21@22863.84,24019.86 ; v2(22925.85,24285.57) 22967.85,24285.57 23177.6,24495.31 23399.61,24495.31 23441.92,24537.63 23441.92,24883.08 v1(23425,24900) ; U12.30@23408.92,25110.52 23408.92,25051.08 v1(23420,25040)
  BOTTOM w6: v2(22852.85,23940.57) 22866.29,23954.01 22866.29,24226.01 v2(22925.85,24285.57) ; v1(23420,25040) 23401,25021 23401,24924 v1(23425,24900)
LCD_HSYNC: CON12.18 U12.27 | length 1140.8
  TOP w6: CON12.18@22903.21,24137.98 22903.21,24099.21 22904.85,24097.57 v2(22904.85,24078.57) ; v2(23022.85,24405.57) 23134.6,24517.31 23382.31,24517.31 23408.92,24543.92 U12.27@23408.92,24805.4
  BOTTOM w6: v2(22904.85,24078.57) 22904.85,24197.57 23022.85,24315.57 v2(23022.85,24405.57)
LCD_ONOFF: J5.1 R51.2 | length 101.6
  TOP w8: R51.2@24209.35,25188.33 24240,25188.33 24257.3,25171.03 J5.1@24303.82,25171.03
LCD_PWDN: CON12.46 U12.32 | length 1609.9
  TOP w6: v2(22546.21,24428.93) 22546.21,24342.21 22627.62,24260.8 CON12.46@22627.62,24137.98 ; v2(22547.85,24485.57) 22620.88,24485.57 22621.32,24485.13 22770.13,24485.13 v1(22960,24675) ; v1(23215,24925) 23310,24925 23335,24950 v1(23335,24975) ; v1(23357.85,25052.64) 23369.55,25064.33 U12.32@23369.55,25110.52
  BOTTOM w6: v2(22546.21,24428.93) 22546.21,24464.93 22547.85,24466.57 v2(22547.85,24485.57) ; v1(22960,24675) 23020,24675 23115,24770 23170,24770 23215,24815 v1(23215,24925) ; v1(23335,24975) 23350,24975 23357.85,24982.85 v1(23357.85,25052.64)
LCD_PWM: J5.2 R52.2 | length 281.8
  TOP w8: R52.2@24209.35,25130 24219.35,25120 24330,25120 24360,25150 24360,25200 24339.74,25220.26 J5.2@24303.82,25220.26
LCD_SCL: R50.2 U5.2 | length 913.3
  TOP w10: U5.2@23734.21,25259.69 23690.31,25259.69 23664.69,25285.31 23664.69,25361.23 23650.91,25375 23610,25375 23595,25360 23595,25020 23625,24990 23701.21,24990 23726.21,24965 23860,24965 23880,24945 R50.2@23880,24925.43
LCD_SDA: R49.2 U5.1 | length 801.9
  TOP w10: U5.1@23734.21,25279.37 23705.63,25279.37 23680,25305 23680,25369.09 23672.91,25376.17 23672.91,25377.09 23660,25390 23600,25390 23580,25370 23580,25013.79 23618.79,24975 23695,24975 23740,24930 R49.2@23740,24925.43
LCD_VD0: CON12.23
LCD_VD1: CON12.22
LCD_VD2: CON12.25 U12.15 | length 1279.2
  TOP w6: CON12.25@22824.47,24019.86 22824.47,23897.95 22825.85,23896.57 v2(22825.85,23877.57)
  TOP w10: v1@23080,24655 v1(23085,24655) 23172.7,24742.7 U12.15@23172.7,24805.4
  BOTTOM w6: v2(22825.85,23877.57) 22874.85,23877.57 22927.85,23930.57 22927.85,24193.54 23042.85,24308.54 23042.85,24587.15 23030,24600 23030,24635 23050,24655 v1(23085,24655)
LCD_VD3: CON12.24 U12.19 | length 908.1
  TOP w6: CON12.24@22844.15,24137.98 22844.15,24295.87 22891.85,24343.57 23128.85,24580.57 23155.57,24580.57 v1(23180,24605) ; v1(23165,24705) 23240,24705 23251.44,24716.44 U12.19@23251.44,24805.4
  BOTTOM w6: v1(23165,24705) 23180,24690 v1(23180,24605)
LCD_VD4: CON12.27 U12.20 | length 1255.7
  TOP w6: v2(22800.85,23901.57) 22800.85,23979.43 22804.78,23983.36 CON12.27@22804.78,24019.86 ; v2(22864.15,24282.57) 23143.15,24561.57 23166.57,24561.57 v1(23175,24570) ; v1(23200,24685) 23240,24685 23271.12,24716.12 U12.20@23271.12,24805.4
  BOTTOM w6: v2(22800.85,23901.57) 22800.85,23920.57 22801.85,23921.57 22801.85,24220.28 v2(22864.15,24282.57) ; v1(23175,24570) 23175,24573.13 23199,24597.13 23199,24684 v1(23200,24685)
LCD_VD5: CON12.26 U12.22 | length 968.7
  TOP w6: CON12.26@22824.47,24137.98 22824.47,24315.13 23114.91,24605.57 v1(23149.43,24605.57) ; v1(23145,24675) 23159,24661 23241,24661 23310.49,24730.49 U12.22@23310.49,24805.4
  BOTTOM w6: v1(23145,24675) 23149.43,24670.57 v1(23149.43,24605.57)
LCD_VD6: CON12.29 U12.23 | length 1311.3
  TOP w6: v2(22772.85,23922.57) 22787.85,23937.57 22787.85,23980.61 22785.1,23983.36 CON12.29@22785.1,24019.86 ; v2(22812,24350.71) 23111.28,24650 23270,24650 23330.18,24710.18 U12.23@23330.18,24805.4
  BOTTOM w6: v2(22772.85,23922.57) 22786.29,23936.01 22786.29,24325.01 v2(22812,24350.71)
LCD_VD7: CON12.28 U12.24 | length 1050.7
  TOP w6: CON12.28@22804.78,24137.98 22804.78,24292.65 22780.85,24316.57 22780.85,24353.57 23050,24622.72 v1(23050,24625) ; v1(23115,24625) 23125,24635 23295,24635 23349.86,24689.86 U12.24@23349.86,24805.4
  BOTTOM w6: v1(23050,24625) v1(23115,24625)
LCD_VD8: CON12.31
LCD_VD9: CON12.30
LCD_VD10: CON12.33 U12.4 | length 1159.3
  TOP w6: CON12.33@22745.73,24019.86 22745.73,23983.36 22748.85,23980.24 v2(22748.85,23893.57) ; v1(22760,24610) 22805.56,24610 22956.16,24760.6 U12.4@22956.16,24805.4
  BOTTOM w6: v2(22748.85,23893.57) 22748.85,24215.57 22768.85,24235.57 22768.85,24314.86 22760.85,24322.86 22760.85,24609.15 v1(22760,24610)
LCD_VD11: CON12.32 U12.6 | length 828.9
  TOP w6: v1(22735,24585) 22805,24585 22995.53,24775.53 U12.6@22995.53,24805.4 ; v2(22746.85,24293.57) 22765.41,24275.02 CON12.32@22765.41,24137.98
  BOTTOM w6: v1(22735,24585) 22746.85,24573.15 v2(22746.85,24293.57)
LCD_VD12: CON12.35 U12.7 | length 1184
  TOP w6: v1(22710,24563.42) 22818.42,24563.42 23015.22,24760.22 U12.7@23015.22,24805.4 ; CON12.35@22726.04,24019.86 22726.04,23983.36 22726.85,23982.54 v2(22726.85,23922.57)
  BOTTOM w6: v1(22710,24563.42) 22734.85,24538.57 22734.85,24337.57 22726.85,24329.57 v2(22726.85,23922.57)
LCD_VD13: CON12.34 U12.11 | length 921.8
  TOP w6: CON12.34@22745.73,24137.98 22745.73,24262.69 22672.85,24335.57 22672.85,24422.85 v2(22710,24460) 22795,24460 23093.96,24758.96 U12.11@23093.96,24805.4
LCD_VD14: CON12.37 U12.12 | length 1273.8
  TOP w6: v2(22685.85,23891.57) 22706.85,23912.57 22706.85,23963.86 22706.36,23964.35 CON12.37@22706.36,24019.86 ; v2@22712.85,24420.57 22780.57,24420.57 23113.64,24753.64 U12.12@23113.64,24805.4
  BOTTOM w6: v2(22685.85,23891.57) 22706.29,23912.01 22706.29,24329.01 22720,24342.72 22720,24413.42 v2@22712.85,24420.57
  other v2: 22705,24415
LCD_VD15: CON12.36 U12.14 | length 1118.3
  TOP w6: v2(22665,24460) 22657.85,24452.85 22657.85,24330.57 22726.04,24262.39 CON12.36@22726.04,24137.98 ; v2(22695,24375) 22710.45,24390.45 22775.45,24390.45 23095.57,24710.57 23110.57,24710.57 23153.01,24753.01 U12.14@23153.01,24805.4
  BOTTOM w6: 22657.85,24450.57 22657.85,24400 22682.85,24375 v2(22695,24375)
LCD_VD16: CON12.39
LCD_VD17: CON12.38
LCD_VD18: CON12.41 U12.51 | length 1466.2
  TOP w6: v2(22665,24520) 22665,24563.72 22883.79,24782.51 22883.79,24948.58 22995.53,25060.32 U12.51@22995.53,25110.52 ; CON12.41@22666.99,24019.86 22666.99,23975.43 22683.85,23958.57 v2(22683.85,23923.57)
  BOTTOM w6: v2(22665,24520) 22650,24520 22637.85,24507.85 22637.85,24390.57 22683.85,24344.57 v2(22683.85,23923.57)
LCD_VD19: CON12.40 U12.52 | length 1162
  TOP w6: v2(22617.85,24430.57) 22617.85,24345.57 22686.67,24276.76 CON12.40@22686.67,24137.98 ; v2(22635,24540) 22635,24570 22687,24622 22707.72,24622 22872.79,24787.07 22872.79,24965.98 22975.85,25069.03 U12.52@22975.85,25110.52
  BOTTOM w6: v2(22617.85,24430.57) 22617.85,24511.57 22635,24528.72 v2@22635,24540.57
LCD_VD20: CON12.43 U12.54 | length 1473.4
  TOP w6: v2@22583.64,24541.36 22583.64,24543.64 22673,24633 22703.17,24633 22861.79,24791.63 22861.79,24986.58 22936.48,25061.26 U12.54@22936.48,25110.52 ; CON12.43@22647.3,24019.86 22647.3,23954.19 22655.5,23945.98 v2(22655.5,23926.98)
  BOTTOM w6: v2@22583.64,24541.36 22595.85,24529.15 22595.85,24402.57 22655.5,24342.92 v2(22655.5,23926.98)
  other v2: 22590,24535
LCD_VD21: CON12.42 U12.55 | length 1215
  TOP w6: v2(22542.85,24535.57) 22542.85,24550 22636.85,24644 22698.61,24644 22850.79,24796.18 22850.79,24999.58 22916.79,25065.58 U12.55@22916.79,25110.52 ; v2(22572.85,24465.57) 22597.85,24440.57 22597.85,24340.57 22666.99,24271.43 CON12.42@22666.99,24137.98
  BOTTOM w6: v2(22542.85,24535.57) 22572.85,24505.57 v2(22572.85,24465.57)
LCD_VD22: CON12.45 U12.56 | length 1634.1
  TOP w6: v2@22497.85,24550 22602.85,24655 22694.05,24655 22839.79,24800.74 22839.79,25011.72 22897.11,25069.03 U12.56@22897.11,25110.52 ; CON12.45@22627.62,24019.86 22627.62,23916.8 v2(22653.85,23890.57)
  BOTTOM w6: v2(22497.85,24540.57) 22522.85,24515.57 22522.85,24424 22631.85,24315 22631.85,23912.57 v2(22653.85,23890.57)
LCD_VD23: CON12.44 U12.3 | length 1058.5
  TOP w6: CON12.44@22647.3,24137.98 22647.3,24266.13 22577.85,24335.57 22577.85,24425.57 22499.21,24504.21 22505.57,24510.57 22577.85,24510.57 22590.85,24497.57 22677.57,24497.57 22691,24511 22691,24571.29 22759.71,24640 22810,24640 22936.48,24766.48 U12.3@22936.48,24805.4
  other v2: 22495,24500
LCD_VOTCLK: CON12.19 U12.31 | length 1621.3
  TOP w6: CON12.19@22883.52,24019.86 22883.52,23983.36 22883.85,23983.02 22883.85,23943.57 22887.85,23939.57 v2(22887.85,23920.57) ; v1(23240,24905) 23360,24905 23370,24915 v1(23370,24955) ; v1(23387.85,25037.64) 23387.85,25056.64 23389.23,25058.02 U12.31@23389.23,25110.52
  BOTTOM w6: v2(22887.85,23920.57) 22887.85,23939.57 22884.85,23942.57 22884.85,24205.57 22987.85,24308.57 22987.85,24647.85 23004,24664 23024.56,24664 23110.56,24750 23175,24750 23240,24815 v1(23240,24905) ; v1(23370,24955) 23380,24965 23380,25029.79 v1(23387.85,25037.64)
LCD_VSYNC: CON12.20 U12.28 | length 1058.1
  TOP w6: CON12.20@22883.52,24137.98 22883.52,24276.24 22938.85,24331.57 22988.85,24331.57 23163.6,24506.31 23395.05,24506.31 23428.6,24539.87 U12.28@23428.6,24805.4
LINK&ACT: J2.13 J2.14 U8.28 | length 2168.1
  TOP w6: U8.28@22067.07,21812.3 22067.07,21849.78 22083.85,21866.57 22163.43,21866.57 22195,21835 v2(22195,21810)
  BOTTOM w6: J2.14@20970.63,22621.08 J2.13@21049.37,22621.08 21163.92,22621.08 21204,22581 21204,21964.99 21402.99,21766 22151,21766 v2(22195,21810)
MD_RESETBB: CON11.56
MD_RSTN: CON12.66
MD_USBDN: CON10.13 J2.29 J2.30 R129.2 | length 1161.9
  TOP w6: J2.30@20970.63,23251 J2.29@21049.37,23251 21050.37,23250 21180,23250 21180,23297.08 R129.2@21222.42,23339.5 ; v4(21473.85,23015.07) 21491.12,22997.81 21580.09,22997.81 21584.43,23002.15 CON10.13@21609.9,23002.15
  BOTTOM w6: J2.30@20970.63,23251 J2.29@21049.37,23251 21050.37,23250 21145,23250 21171,23224 21171,23079.56 21252.99,22997.57 21456.35,22997.57 v4(21473.85,23015.07)
MD_USBDP: CON10.11 J2.27 J2.28 R128.2 | length 1017
  TOP w6: J2.27@21049.37,23172.26 21172.26,23172.26 21222.42,23222.42 R128.2@21222.42,23276.57 ; v4(21473.85,22974.57) 21486.09,22986.81 21580.11,22986.81 21584.45,22982.47 CON10.11@21609.9,22982.47
  BOTTOM w6: J2.28@20970.63,23172.26 J2.27@21049.37,23172.26 21132.74,23172.26 21160,23145 21160,23075 21248.43,22986.57 21461.85,22986.57 v4(21473.85,22974.57)
MD_WAKEUP_AP: CON12.69
MOTOR_PWM: CON10.52
NetBAT1_1: BAT1.1 D2.1 | length 231.6
  TOP w20: BAT1.1@21870,25165 21870,25389.51 D2.1@21875,25394.51
NetC8_2: C8.2 C9.2 U1.30 | length 247.8
  TOP w10: U1.30@23362.24,21412.83 23362.24,21372.76 23425.63,21309.37 C8.2@23436.67,21309.37 23368.33,21241.04 C9.2@23368.33,21230.63
NetC9_1: C9.1 C16.2 U1.29 | length 187.4
  TOP w10: C16.2@23300,21309.37 C9.1@23368.33,21309.37 23330.75,21346.96 U1.29@23330.75,21412.83
NetC10_1: C10.1 C18.1 L1.2 R13.2 R15.2 | length 404.4
  TOP w20: C10.1@24029.37,21527 C18.1@24029.37,21451 24025.43,21447.06 R15.2@24025.43,21375 24060.2,21375 L1.2@24104.57,21330.63 ; R13.2@24104.57,21447.6 L1.2@24104.57,21330.63 ; L1.2@24130.2,21305 L1.2@24104.57,21330.63
NetC10_2: C10.2 U1.1 | length 549.8
  TOP w8: U1.1@23492.17,21479.76 23512.35,21479.76 23528.31,21463.8 23528.31,21448.3 23548,21428.62 23887,21428.62 23915,21456.62 23915,21491.37 C10.2@23950.63,21527
NetC12_2: C12.2 U4.2 | length 139
  TOP w10: C12.2@22550,21389.37 22550,21519.99 U4.2@22555.96,21525.95
NetC13_1: C13.1 U4.6 | length 138.3
  TOP w10: U4.6@22755.96,21525.95 22760,21521.91 C13.1@22760,21389.37
NetC14_1: C14.1 U4.3 | length 142.4
  TOP w10: U4.3@22605.96,21525.95 22605.96,21403.41 C14.1@22620,21389.37
NetC14_2: C14.2 U4.1 | length 292.2
  TOP w10: U4.1@22505.96,21525.95 22505.96,21374.04 22529.06,21350.94 22579.69,21350.94 C14.2@22620,21310.63
NetC15_1: C15.1 U4.4 | length 238.6
  TOP w10: U4.4@22655.96,21525.95 22660.31,21521.59 22660.31,21324.69 22674.37,21310.63 C15.1@22690,21310.63
NetC15_2: C15.2 U4.5 | length 120.6
  TOP w10: C15.2@22705.96,21405.33 U4.5@22705.96,21525.95
NetC19_1: C19.1 C21.1 L2.2 R19.1 R29.2 | length 391.7
  TOP w20: C21.1@24029.37,21603 24025.43,21606.94 R29.2@24025.43,21679 24029.37,21682.94 C19.1@24029.37,21755 24085.2,21755 L2.2@24104.57,21774.37 ; R19.1@24104.57,21657.4 L2.2@24104.57,21774.37 ; L2.2@24130.2,21800 L2.2@24104.57,21774.37
NetC19_2: C19.2 U1.2 | length 801.6
  TOP w8: U1.2@23492.17,21511.26 23528.74,21511.26 23541.31,21498.69 23541.31,21453.69 23553.38,21441.62 23881.62,21441.62 23900,21460 23900,21730 23925,21755 C19.2@23950.63,21755
NetC26_1: C26.1 C27.1 U8.44 | length 256.7
  TOP w10: C26.1@21709.37,21760 21709.37,21695.75 C27.1@21720.12,21685 21720.12,21679.88 21758.96,21641.04 U8.44@21876.12,21641.04
NetC28_2: C28.2 R37.2 R38.2 | length 202.3
  TOP w10: R37.2@22108.33,21305.63 v1(22109.37,21305.63) ; v1(22205,21305.63) 22270,21370.63 C28.2@22270,21384.37
  BOTTOM w10: v1(22109.37,21305.63) v1(22205,21305.63)
NetC29_2: C29.2 R34.2 R35.2 | length 313.6
  TOP w10: C29.2@21767.85,21384.94 21767.85,21379.1 21801.95,21345 21915,21345 21940,21320 v1(21940,21305.63) ; R35.2@22035,21305.63 v1(22035.63,21305)
  BOTTOM w10: v1(21940,21305.63) 22035,21305.63 v1(22035.63,21305)
NetC35_2: C35.2 R30.1 R40.1 U8.34 | length 396.1
  TOP w8: C35.2@21901.43,21956.2 21783.58,21956.2 R30.1@21779.64,21960.14 21779.64,21930.36 21824.43,21885.57 21917.85,21885.57 21948.96,21854.47 U8.34@21948.96,21812.3
  other v3: 21840.53,21960.14
NetC36_1: C36.1 R47.1 U8.47 Y1.1 | length 383.4
  TOP w10: Y1.1@21611.54,21372.32 21619.16,21379.94 C36.1@21697.85,21379.94 ; C36.1@21697.85,21384.94 21700.37,21384.94 R47.1@21765,21449.57 21797.28,21481.85 21797.28,21540 21839.27,21581.99 U8.47@21876.12,21581.99
NetC37_1: C37.1 R47.2 U8.46 Y1.3 | length 447.9
  TOP w10: Y1.3@21538.46,21487.68 21538.46,21466.54 21562.3,21442.7 C37.1@21697.85,21442.7 ; C37.1@21697.85,21445.63 21697.85,21447.99 21765,21515.14 R47.2@21765,21520.43 21765,21537.72 21828.96,21601.67 U8.46@21876.12,21601.67
NetC51_2: C51.2 J6.5 U5.9 | length 561.3
  TOP w10: v5(23820,25510) 23835.83,25525.83 J6.5@23891.26,25525.83 ; 23829.68,25109.69 U5.9@23829.68,25164.21
  BOTTOM w10: v5(23820,25510) 23820,25395 23840,25375 v1(23840,25089.37)
NetC52_2: C52.2 J6.4 U5.17 | length 337.5
  TOP w10: U5.17@23829.68,25315.79 23829.68,25345.32 23779.37,25395.63 C52.2@23779.37,25400 23779.37,25409.37 23840,25470 23915,25470 23930.63,25485.63 J6.4@23930.63,25525.83
NetC53_2: C53.2 J6.3 U5.16 | length 302.4
  TOP w10: U5.16@23849.37,25315.79 23849.37,25391.26 C53.2@23840.63,25400 23840.63,25405.63 23880,25445 23940,25445 23970,25475 J6.3@23970,25525.83
NetC54_2: C54.2 J6.2 U5.14 | length 352.2
  TOP w10: U5.14@23885.79,25259.69 23929.69,25259.69 23975,25305 23990.63,25305 23990.63,25395.63 24009.37,25414.37 J6.2@24009.37,25525.83
NetC55_2: C55.2 J6.1 U5.13 | length 426.1
  TOP w10: U5.13@23885.79,25240 23983.96,25240 23990.63,25246.67 24016.67,25246.67 24025,25255 24025,25420 24048.74,25443.74 J6.1@24048.74,25525.83
NetC95_1: C95.1 R3.1 | length 56.6
  TOP w8: C95.1@20930.06,25217.85 20930.06,25166.79 R3.1@20934,25162.85
NetC96_1: C96.1 U22.2 | length 137.4
  TOP w12: C96.1@21001.43,25107.85 C96.1@21005.11,25111.54 ; C96.1@21008.8,25107.85 21017.85,25107.85 21072.35,25162.35 U22.2@21118.37,25162.35
NetC148_1: C148.1 R50.1 U17.8 | length 175.8
  TOP w10: C148.1@23810,24850.63 23876.06,24850.63 R50.1@23880,24854.57 23880,24764.57 U17.8@23890.04,24754.53
NetC149_1: C149.1 R49.1 U17.1 | length 184.1
  TOP w10: C149.1@23670,24850.63 23673.94,24854.57 R49.1@23740,24854.57 23740,24784.49 U17.1@23769.96,24754.53
NetD1_2: D1.2 D2.2 R23.2 | length 429.6
  TOP w20: D2.2@21875,25530.49 D1.2@22005,25530.49 22069.51,25530.49 22100,25500 22100,25395 22130,25365 R23.2@22174.57,25365
NetD3_1: D3.1 R6.1 | length 56.8
  TOP w30: R6.1@20999.86,25439.28 D3.1@20999.86,25496.06
NetD4_1: D4.1 R105.1 | length 78.3
  TOP w10: D4.1@24140,24966.5 24212.73,24966.5 R105.1@24216.67,24970.43
NetD4_2: D4.2 Q2.3 | length 88.2
  TOP w10: D4.2@24140,24895.63 24185.5,24850.13 Q2.3@24185.5,24826.25
NetD5_1: D5.1 R106.1 | length 78.3
  TOP w10: D5.1@24293.33,24966.5 24366.06,24966.5 R106.1@24370,24970.43
NetD5_2: D5.2 Q3.3 | length 88.9
  TOP w10: D5.2@24293.33,24895.63 24340.5,24848.46 Q3.3@24340.5,24826.25
NetL7_1: L7.1 U22.5
NetQ2_1: Q2.1 R1.1 | length 79.6
  TOP w10: Q2.1@24147.5,24733.75 24147.5,24657.07 R1.1@24149.57,24655
NetQ3_1: Q3.1 R2.1 | length 81.7
  TOP w10: Q3.1@24302.5,24733.75 24302.5,24662.07 R2.1@24309.57,24655
NetQ7_1: Q7.1 R8.2 R9.1 | length 568.7
  TOP w6: Q7.1@21178.43,25560.85 21211.05,25560.85 21222.43,25549.48 21222.43,25465 21240,25447.43 21240,25340 21250.05,25329.95 21250.05,25329.11 21264.16,25315 21406.39,25315 R9.1@21429.25,25337.85 21484.25,25282.85 R8.2@21500.11,25282.85
NetQ8_1: Q8.1 R7.1 R11.1 | length 252.5
  TOP w6: R7.1@21345,25550.43 21347.07,25552.5 Q8.1@21418.43,25552.5 ; Q8.1@21429.25,25541.67 21464.28,25506.63 21464.28,25430.72 21500.11,25394.89 R11.1@21500.11,25392.85
NetQ8_3: Q8.3 R9.2 | length 175.1
  TOP w6: R9.2@21500.11,25337.85 21529.77,25367.51 21529.77,25379.77 21529.77,25415.85 21510.93,25434.69 21510.93,25492.85
NetR3_2: R3.2 U22.1 | length 136.4
  TOP w12: R3.2@21001.43,25162.85 R3.2@21003.15,25164.57 ; R3.2@21004.86,25162.85 21027.85,25162.85 21077.35,25212.35 U22.1@21118.37,25212.35